# Altium PCB PCB4_impression.PcbDoc
Units mil, origin at the board's own origin, x right, y up, seen from the top; angles counter-clockwise.
Board outline 6000 x 4000 mil, 2 copper layers (Top Layer, Bottom Layer); 55 components, 41 nets, 174 pads, 20 vias.
Unrouted connection lines stored in the file: 6.
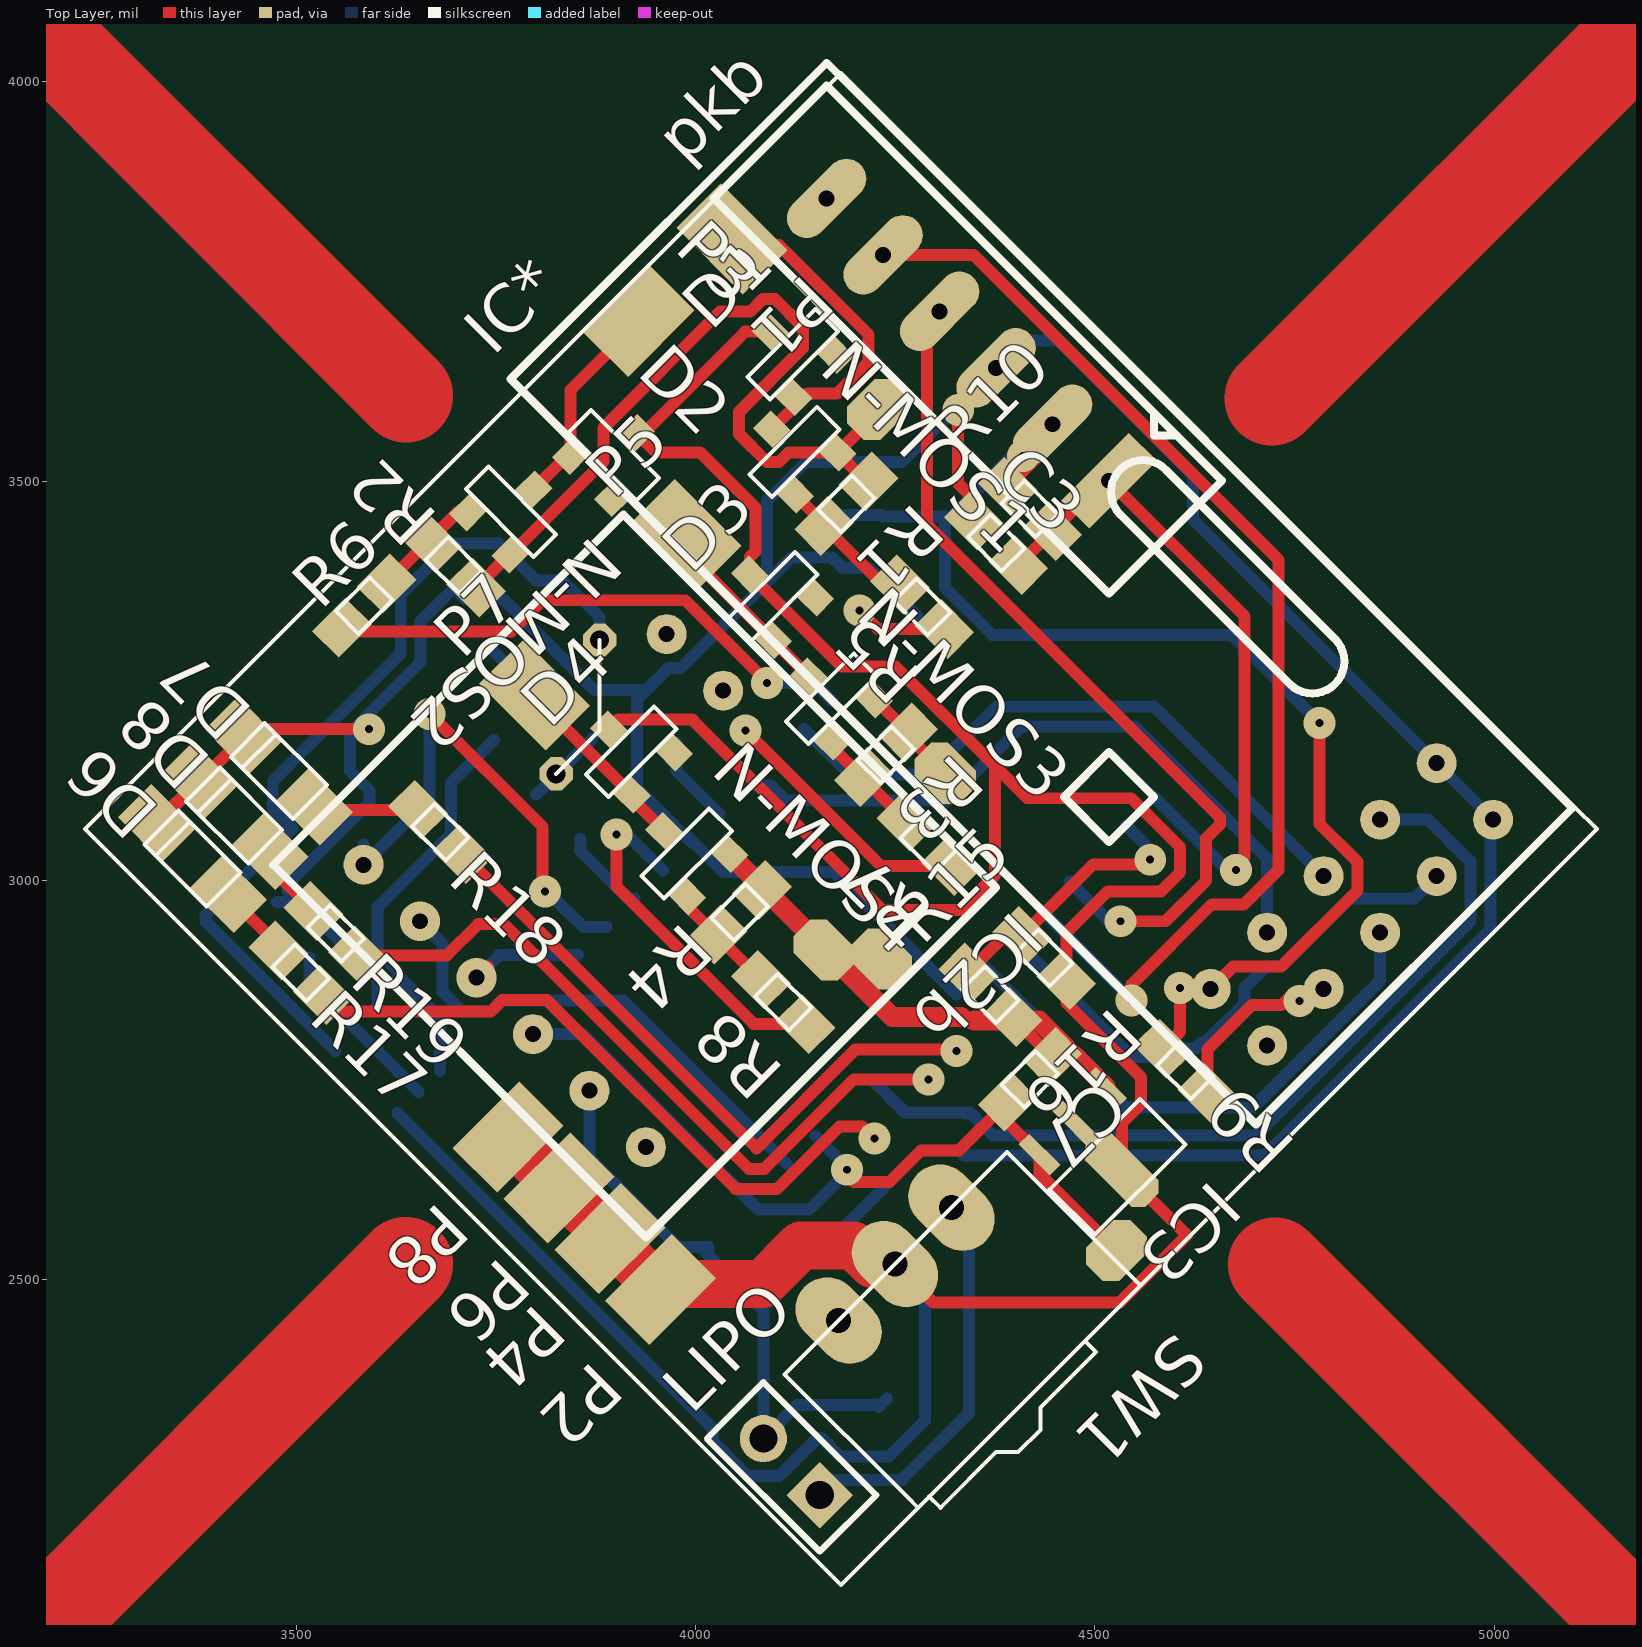
[diagram p0: Top Layer view]
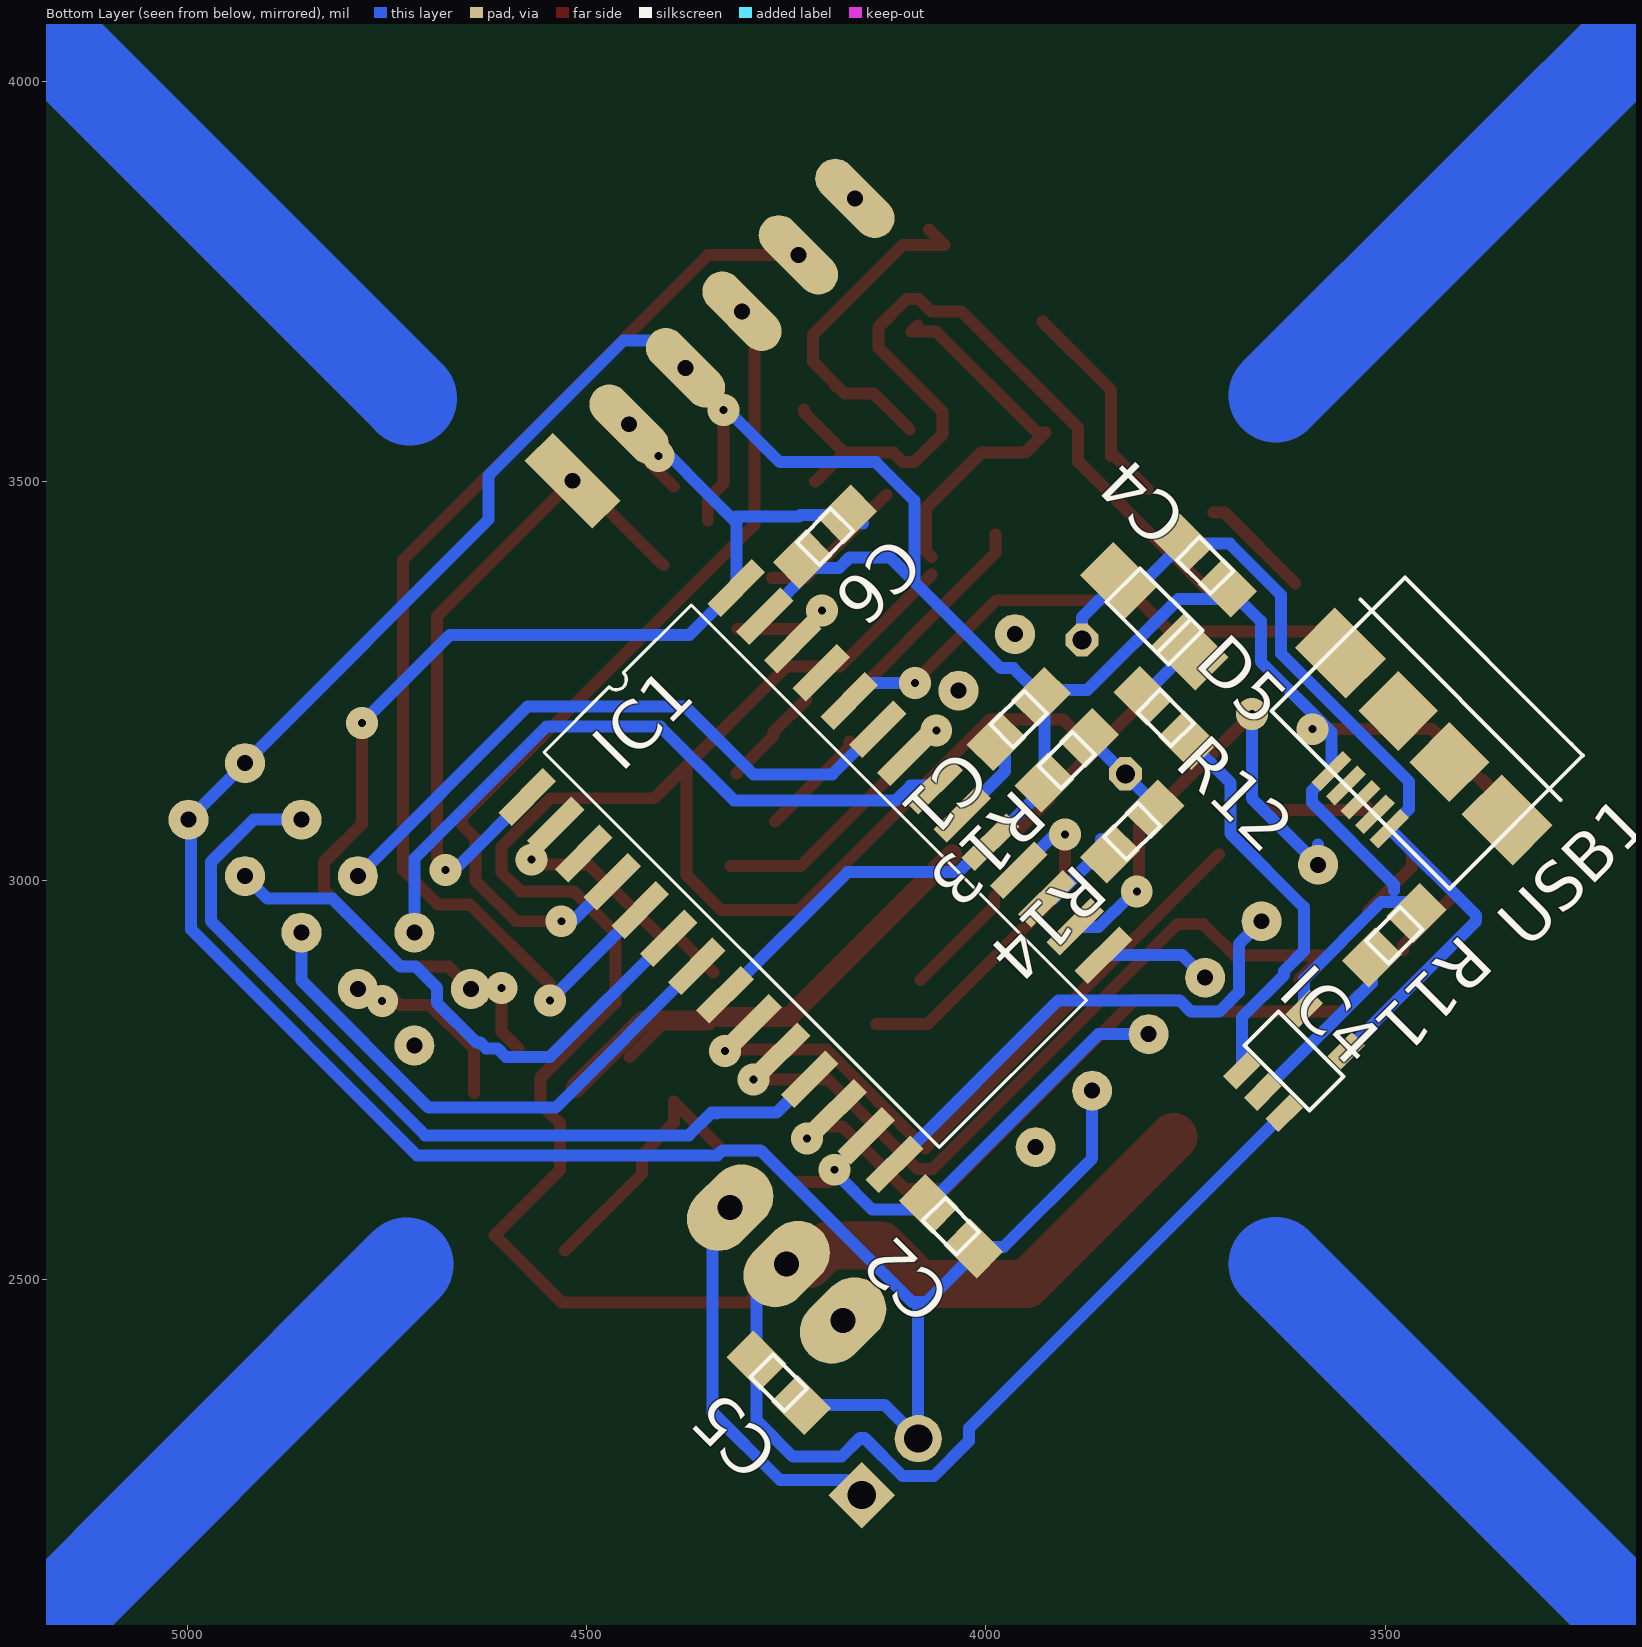
[diagram p1: Bottom Layer view, seen from below]

## Layer stack, top to bottom
Top Layer: signal copper 1.4
Dielectric: dielectric 12.6, FR-4, Dk 4.8
Bottom Layer: signal copper 1.4

## Board outline
1000,1000 7000,1000 7000,5000 1000,5000

## Design rules (kind name [scope] priority, off if disabled: settings)
Clearance [All] p1: gap=10
ComponentClearance [All] p1 off: gap=10 collisioncheckmode=3 verticalgap=10 showdistances=FALSE
PolygonConnect [All] p1: connectstyle=Relief reliefconductorwidth=10 reliefentries=4 polygonreliefangle="90 Angle"
RoutingVias [All] p1: holewidth=10 width=40 viastyle="Through Hole" minholewidth=10 minwidth=40 maxholewidth=10 maxwidth=40
SilkscreenOverComponentPads [All] p1: minsilkscreentomaskgap=10
SolderMaskExpansion [All] p1: expansion=4
Width [All] p1: maxlimit=15 minlimit=15 preferedwidth=15
26 further rules are at their usual default settings.

## Components (designator, comment, footprint, x,y, rotation, side; value= is the part's Value field where it differs from the comment)
C1 "TANTALE 10uf" cms805 3959,3201.93 r315 bottom
C2 "0.1uf ceramique" cms805 4043.85,2566.95 r45 bottom
C3 "1uf" cms805 4376.19,3422.55 r315 top
C4 "4.7uF" cms805 3725.65,3394.27 r45 bottom
C5 "4.7uF" cms805 4259.52,2371.08 r45 bottom
C6 "0.1uf ceramique" cms805 4201.54,3430.33 r315 bottom
C7 "1uF" cms805 4418.62,2750.8 r225 top
D1 "BAT54" SOT23 4093.35,3687.01 r45 top
D2 "BAT54" SOT23 3925.76,3560.44 r315 top
D3 "BAT54" SOT23 4067.89,3382.95 r45 top
D4 "BAT54" SOT23 3891.12,3189.21 r45 top
D5 "LED" cms1206 3789.29,3330.63 r225 bottom
D6 "LED" cms1206 3369.98,3027.28 r135 top
D7 "LED" cms1206 3478.17,3136.88 r135 top
D8 "LED" cms1206 3422.3,3081.02 r135 top
IC1 "dsPIC33FJ128MC802" SOIC28(300mil) 4574.18,3104.35 r135 bottom
IC2b "MPU6050" MPU6050_drotek 3937.79,2665.95 r225 top
IC3 "MCP1700" SOT89 4514.08,2740.19 r225 top
IC4 "MCP73831" SOT23-5 3623.12,2761.41 r225 bottom
IC* "NRF24L01" NRF24L01 4715.6,2793.23 r135 top
LIPO "Header 2" HDR1X2 4155.57,2230.37 r135 top
N-MOS1 "FD339" SOT23 4095.47,3564.68 r45 top
N-MOS2 "FD339" SOT23 3797.07,3489.73 r315 top
N-MOS3 "FD339" SOT23 4141.43,3255.67 r45 top
N-MOS4 "FD339" SOT23 3960.41,3061.93 r45 top
P1 "pad_moteur" PAD 4045.27,3802.97 r225 top
P2 "pad_moteur" PAD 3956.17,2487.76 r135 top
P3 "pad_moteur" PAD 3929.3,3699.74 r315 top
P4 "pad_moteur" PAD 3892.53,2551.39 r135 top
P5 "pad_moteur" PAD 3987.99,3433.16 r45 top
P6 "pad_moteur" PAD 3828.89,2615.03 r135 top
P7 "pad_moteur" PAD 3798.49,3232.34 r45 top
P8 "pad_moteur" PAD 3765.25,2678.67 r135 top
pkb "pickit3" pickit3 4517.61,3500.33 r135 top
R1 "10k" cms805 4188.81,3471.34 r225 top
R2 "10k" cms805 3697.37,3394.27 r135 top
R3 "10k" cms805 4238.31,3157.39 r225 top
R4 "10k" cms805 4055.17,2960.1 r225 top
R5 "330" cms805 4283.56,3342.65 r135 top
R6 "330" cms805 3584.94,3344.06 r45 top
R7 "330" cms805 4292.05,3045.66 r135 top
R8 "330" cms805 4109.61,2847.67 r135 top
R9 "10k" cms805 4613.07,2761.41 r135 top
R10 "10k" cms805 4418.62,3464.98 r135 top
R11 "4.7k" cms805 3488.77,2931.11 r315 bottom
R12 "150" cms805 3775.15,3203.35 r45 bottom
R13 "10k" cms805 3898.89,3150.31 r135 bottom
R14 "330" cms805 3816.87,3061.22 r315 bottom
R15 "17.25k" cms805 4369.12,2856.87 r135 top
R16 "4.7k" cms805 4436.3,2902.83 r315 top
R17 "65 + test" cms805 3505.74,2884.44 r315 top
R18 "65 + test" cms805 3680.4,3060.51 r315 top
R19 "65 + test" cms805 3549.58,2933.94 r315 top
SW1 "" inverseur 4320.33,2590.29 r225 top
USB1 "USB" USB_con 3531.2,3100.82 r45 bottom

## Footprints (in the part's own frame and the unit in brackets; to place one, negate y for a bottom-side part, rotate by r counter-clockwise, add the part's x,y. Pads: shape width x height; smd on the part's side, far side on the other; paste and mask are expansions set on the pad)
cms805 [mm]
  rect 1.5x1.2 smd: 1(-1,0) 2(1,0)
  silkscreen extent -0.76,-0.51 0.76,0.51
cms1206 [mm]
  rect 2x1.5 smd: 1(-1.6,0) 2(1.6,0)
  silkscreen extent -1.4,-0.76 1.4,0.76
HDR1X2 [mm] "Connector; Header; 2 Position"
  rect 1.5x1.5 hole 0.9: 1(0,0)
  round 1.5 hole 0.9: 2(2.54,0)
  silkscreen extent -1.27,-1.27 3.81,1.27
inverseur [mil]
  oval 80x120 hole 31.5: 1(0,0) 2(100,0) 3(200,0)
  silkscreen extent -98,0 295,276
MPU6050_drotek [mil]
  round 50 hole 20: 1(0,0) 2(0,-100) 3(0,-200) 4(0,-300) 5(0,-400) 6(0,-500) 7(-472.44,-335.83) 8(-472.44,-435.83)
  silkscreen extent -540,-580 80,80
NRF24L01 [mil]
  round 50 hole 20: 1(0,0) 2(0,-100) 3(0,-200) 4(0,-300) 5(0,-400) 6(100,-400) 7(100,-300) 8(100,-200) 9(100,-100) 10(100,0)
  silkscreen extent -60,-480 1260,80
PAD [mm]
  rect 2x3 smd: 1(0,0)
pickit3 [mil]
  rect 50x120 hole 20: 1(0,0)
  oval 50x120 hole 20: 2(100,0) 3(200,0) 4(300,0) 5(400,0) 6(500,0)
  silkscreen extent -100,-100 600,100
SOIC28(300mil) [mm]
  rect 2x0.6 smd: 1(0,0) 2(0,-1.27) 3(0,-2.54) 4(0,-3.81) 5(0,-5.08) 6(0,-6.35) 7(0,-7.62) 8(0,-8.89) 9(0,-10.16) 10(0,-11.43) 11(0,-12.7) 12(0,-13.97) 13(0,-15.24) 14(0,-16.51) 15(9.4,-16.51) 16(9.4,-15.24) 17(9.4,-13.97) 18(9.4,-12.7) 19(9.4,-11.43) 20(9.4,-10.16) 21(9.4,-8.89) 22(9.4,-7.62) 23(9.4,-6.35) 24(9.4,-5.08) 25(9.4,-3.81) 26(9.4,-2.54) 27(9.4,-1.27) 28(9.4,0)
  silkscreen extent 1.38,-17.14 8,0.64
SOT23 [mm]
  rect 0.8x0.9 smd: 1(-0.95,-2) 2(0,0) 3(0.95,-2)
  silkscreen extent -1.52,-1.52 1.52,-0.51
SOT23-5 [mm]
  rect 0.6x1.1 smd: 1(-1.016,-1.016) 2(-0.066,-1.016) 3(0.884,-1.016) 4(0.884,1.784) 5(-1.016,1.784)
  silkscreen extent -1.52,-0.38 1.4,1.14
SOT89 [mm]
  rect 0.48x1.4 smd: 1(0,0) 3(3,0)
  rect 0.48x2 smd: 2(1.5,0.3)
  oct 1.2x2.7 smd: 2(1.5,2.2)
  silkscreen extent -0.51,1.02 3.56,3.05
USB_con [mm]
  rect 2.3x1.8 smd: 0(-3.75,-2.85) 0(3.75,-2.85)
  rect 1.8x1.8 smd: 0(-1.15,-2.85) 0(1.15,-2.85)
  rect 0.4x1.4 smd: 1(-1.3,0) 2(-0.65,0) 3(0,0) 4(0.65,0) 5(1.3,0)
  silkscreen extent -4.5,-6 4.5,0

## Part data
C1 C2 C3 C4 C5 C6 C7: library part Capa
D1 D2 D3 D4: library part "Schottky BAT54"
IC2b: library part MPU6050-drotek
IC4: library part "MCP73831 Li-Po"
LIPO: "Header, 2-Pin"
N-MOS1 N-MOS2 N-MOS3 N-MOS4: library part "N-MOS FD339"
R1 R2 R3 R4 R5 R6 R7 R8 R9 R10 R11 R12 R13 R14 R15 R16 R17 R18 R19: library part Resistance
SW1: library part switch

## Free pads (board coordinates)
  oct 39.37x39.37 hole 23.62 rot 45: 0(3825.36,3133.34) 2(3879.8,3300.93)
  oct 78.74x59.06 smd rot 135: 1(4160.52,2912.73) 1(4232.65,2901.41) 2(4312.55,3134.05)
  oct 78.74x59.06 smd rot 45: 2(4227.7,3589.43) 3(4526.81,2536.55)

## Via types
v1: diameter 40, hole 10, Top Layer to Bottom Layer, 20 vias

## Nets (pads, with @x,y where several pads share a name; then routed paths per layer and width w, separated by ;. In a path a pad name is that pad's centre, name@x,y a point inside that pad or via, vN(x,y) a via of type N, cw(c..) or ccw(c..) an arc to the next point about the centre after c; other vN are vias at no path point)
GND: C1.1 C2.1 C3.1 C4.1 C5.1 C6.2 C7.1 D6.2 D7.2 D8.2 IC1.8 IC1.19 IC1.27 IC2b.2 IC3.1 IC4.5 IC*.5 IC*.6 LIPO.2 N-MOS1.3 N-MOS2.3 N-MOS3.3 N-MOS4.3 pad.1 pad.2@4227.7,3589.43 pad.2@4312.55,3134.05 pkb.3 R1.1 R2.1 R3.1 R4.1 R11.1 R13.1 R15.1 USB1.5 | length 8296
  Top Layer w15: D8.2 3325.44,3073.23 D6.2 3325.44,3070.41 3433.62,3178.59 D7.2 3441.41,3189.21 v1(3591.3,3189.21) ; R2.1 N-MOS2.3@3766.38,3407.6 ; N-MOS2.3 3884.8,3524.56 3884.8,3551.59 3884.6,3551.8 3884.6,3566.29 4030.32,3712.01 4068.22,3712.01 4084.39,3728.17 4099.21,3728.17 4134.51,3692.87 4134.51,3666.62 4054.31,3586.42 4054.31,3558.82 4089.61,3523.52 4104.11,3523.52 4116.04,3535.45 N-MOS1.3 ; N-MOS4.3 4042.54,3028.41 R4.1 4242.81,2828.14 R15.1@4396.96,2828.14 ; R1.1@4213.86,3499.18 N-MOS1.3 ; N-MOS3.3@4224.93,3226.44 R3.1 4266.14,3180.46 pad.2@4312.55,3134.05 ; pad.2@4227.7,3589.43 4227.7,3585.55 N-MOS1.3 ; C3.1 4348.35,3477.09 4328.45,3496.99 4328.45,3594.01 pkb.3 ; R15.1 R15.1@4396.96,2828.14 ; C7.1 4400.47,2824.62 R15.1@4396.96,2828.14
  Top Layer w25: N-MOS4.3 4246.58,2828.65 4332.1,2828.65 ; 4348.33,2824.62 4400.47,2824.62 4429.65,2824.62 IC3.1
  Bottom Layer w15: R11.1@3475.08,2973.09 3504.95,2973.09 3601.74,2876.3 IC4.5 IC4.5@3599.98,2841.12 ; 3489.22,2987.23 3489.22,2992.66 ; 3490.44,2993.89 3489.22,2992.66 ; IC2b.2 3867.07,2651.8 3977.83,2541.05 C2.1@4005.67,2541.05 ; IC1.19 IC1.19@3987.99,3054.15 ; C2.1 4016.01,2541.05 C2.1@4005.67,2541.05 ; C5.1@4229.11,2340.68 C5.1 ; C5.1@4239.46,2351.02 C5.1 ; IC1.27 4216.65,3391.18 4183.87,3391.18 4170.88,3404.17 4119.76,3404.17 4089.58,3373.99 ; IC1.8 4173.25,3010.31 4034.66,3010.31 3990.82,3054.15 IC1.19@3987.99,3054.15 ; 3489.22,2992.66 3489.22,2995.11 3591.85,3097.74 3591.85,3112.24 3567.39,3136.7 USB1.5 3567.39,3185.47 3655.82,3273.91 3655.82,3324.44 C4.1 3711.94,3352.3 3758.96,3352.3 3873,3238.26 C1.1@3938.23,3238.26 ; C1.1@3938.23,3238.26 3965.66,3265.69 3981.28,3265.69 4089.58,3373.99 ; C1.1@3938.23,3238.26 3926.73,3226.76 R13.1 3926.73,3115.4 IC1.19@3987.99,3054.15 ; C2.1@4005.67,2541.05 4074.74,2471.98 ; 4074.74,2471.98 4084.86,2461.85 LIPO.2 4127.03,2343.24 C5.1 ; 4074.74,2471.98 4092.42,2471.98 4282.37,2661.93 4330.01,2661.93 4336.14,2655.8 4712.52,2655.8 4995.23,2938.51 4995.23,3072.86 IC*.5 IC*.6 4622.97,3451.54 4622.97,3506.7 4453.97,3675.69 4410.13,3675.69 pkb.3 4258.1,3523.67 4137.9,3523.67 4089.58,3475.35 4089.58,3373.99
  other v1: 4328.82,3588.72
NET1: IC1.6 IC*.4 | length 711.7
  Bottom Layer w15: IC1.6 4545.9,2779.08 4601.05,2779.08 4611.64,2789.67 4625.78,2789.67 4632.82,2796.71 4637.77,2796.71 4687.39,2846.33 4687.39,2865.42 4714.12,2892.15 4733.21,2892.15 4818.21,2977.15 4899.52,2977.15 IC*.4 IC*.4@4917.13,3015.96
NET2: IC1.7 IC*.3 | length 694.2
  Bottom Layer w15: IC1.7 4538.83,2715.44 4697.93,2715.44 4857.02,2874.54 IC*.3
NET3: IC1.21 IC*.9 | length 857.5
  Bottom Layer w15: IC1.21 4094.27,3118.55 4112.6,3100.22 4315.49,3100.22 4407.76,3192.49 4550.39,3192.49 4715.6,3027.28 IC*.9
NET4: IC1.23 IC*.8 | length 797.1
  Bottom Layer w15: IC1.23 4192.34,3132.64 4291.34,3132.64 4376.19,3217.49 4574.18,3217.49 IC*.8
NetC1_2: C1.2 IC1.20 | length 110.9
  Bottom Layer w15: C1.2@3976.23,3171.97 3976.23,3136.62 IC1.20
NetC3_2: C3.2 IC1.1 pkb.1 R10.1 | length 847.9
  Top Layer w15: C3.2 R10.1 4509.65,3500.33 pkb.1 4687.32,3330.63 4687.32,3029.4 v1@4680.95,3023.04
  Bottom Layer w15: IC1.1 4659.03,3019.5 4670.35,3019.5 v1(4676.71,3013.14)
NetD1_1: D1.1 N-MOS1.2 P1.1 | length 430.4
  Top Layer w15: P1.1@4071.43,3814.99 4051.63,3795.2 4104.46,3795.2 4216.64,3683.02 4216.64,3649.14 4188.1,3620.6 4188.1,3619.13 4186.63,3619.13 4176.87,3609.37 4140.16,3609.37 N-MOS1.2
NetD2_1: D2.1 N-MOS2.2 P3.1 | length 262.7
  Top Layer w15: N-MOS2.2 D2.1@3838.55,3531.21 ; D2.1 3843.64,3614.08 P3.1
NetD3_1: D3.1 N-MOS3.2 P5.1 | length 240.2
  Top Layer w15: P5.1 3987.99,3409.96 D3.1 ; D3.1@4097.12,3299.98 N-MOS3.2
NetD4_1: D4.1 N-MOS4.2 P7.1 | length 232.4
  Top Layer w15: P7.1 3798.49,3228.94 D4.1 ; D4.1@3920.35,3101.99 N-MOS4.2
NetD5_2: D5.2 R12.2 | length 77.6
  Bottom Layer w15: D5.2@3748.09,3286.08 R12.2
NetD6_1: D6.1 R17.1 | length 95.3
  Top Layer w15: D6.1@3414.52,2981.32 3477.9,2917.94 R17.1
NetD7_1: D7.1 R18.1 | length 131.5
  Top Layer w15: D7.1 3526.69,3088.35 R18.1
NetD8_1: D8.1 R19.1 | length 97.4
  Top Layer w15: D8.1 3466.85,3016.68 R19.1
NetIC1_2: IC1.2 R15.2 R16.1 | length 364.8
  Top Layer w15: R15.2 4387.24,2930.67 R16.1 4497.91,3020.11 4563.48,3020.11 v1@4574.89,3031.52
  Bottom Layer w15: IC1.2 4581.25,3026.57 4581.25,3025.16 v1@4574.89,3031.52
  other v1: 4569.19,3025.82
NetIC1_4: IC1.4 pkb.4 | length 1090.7
  Top Layer w15: pkb.4 4289.92,3696.91 4289.92,3445.18 4656.25,3078.85 4656.25,3069.75 4639.21,3052.71 4639.21,2999.68 4588.32,2948.79 v1(4531.76,2948.79)
  Bottom Layer w15: IC1.4 4517.61,2948.79 v1(4531.76,2948.79)
NetIC1_5: IC1.5 pkb.5 | length 1464.4
  Top Layer w15: pkb.5 4347.91,3783.18 4729.75,3401.34 4729.75,3013.14 4686.61,2970 4646.31,2970 4545.9,2869.59 v1(4545.9,2849.79)
  Bottom Layer w15: IC1.5 v1(4545.9,2849.79)
NetIC1_9: IC1.9 R18.2 | length 830.2
  Top Layer w15: R18.2 4076.38,2664.53 4200.15,2788.3 4324.55,2788.3 v1(4326.69,2786.15) v1@4326.69,2793.23
NetIC1_10: IC1.10 R19.2 | length 946.1
  Top Layer w15: 3607.57,2875.96 R19.2 3688.62,2906.1 3727.77,2945.25 3760.3,2945.25 4066.73,2638.82 4086.03,2638.82 4198,2750.8 v1(4291.34,2750.8)
NetIC1_11: IC1.11 IC*.7 | length 1100.3
  Bottom Layer w15: IC1.11 4262.12,2709.3 4336.37,2709.3 ; 4337.3,2708.37 4336.37,2709.3 ; IC*.7 4917.13,3076.07 4970.23,3022.96 4970.23,2948.86 4702.17,2680.8 4371.95,2680.8 4343.44,2709.3 4336.37,2709.3
NetIC1_12: IC1.12 R17.2 | length 842.1
  Top Layer w15: R17.2 3554.61,2835.58 3743.26,2835.58 3757.9,2850.22 3813.61,2850.22 4050.01,2613.82 4102.04,2613.82 4180.32,2692.11 4208.61,2692.11 v1(4224.16,2676.55)
NetIC1_14: IC1.14 IC2b.5 | length 632.6
  Bottom Layer w15: IC2b.5 3683.15,2920.58 3683.15,2860.47 3708.05,2835.58 3743.26,2835.58 3757.55,2849.87 3909.43,2849.87 IC1.14
NetIC1_15: IC1.15 IC2b.4 | length 159
  Top Layer w15: IC2b.4 IC2b.4@3739.8,2892.22
  Bottom Layer w15: IC2b.4 3753.99,2906.42 IC1.15
NetIC1_16: IC1.16 IC2b.6 | length 647.5
  Top Layer w15: v1(3666.96,3208.3) 3808.39,3066.88 3808.39,2992.63 3817.58,2992.63 v1(3811.21,2986.27)
  Bottom Layer w15: 3584.23,3044.96 IC2b.6 3666.96,3102.23 v1(3666.96,3208.3) ; v1(3811.21,2986.27) 3817.58,2992.63 3817.58,2982.73 3840.2,2960.11 3840.64,2960.11 3858.97,2941.77 IC1.16
NetIC1_17: IC1.17 R14.2 | length 107.6
  Bottom Layer w15: R14.2@3856.02,3051.76 3856.02,3036.21 3915.1,2977.13 IC1.17
NetIC1_18: IC1.18 R8.1 | length 450
  Top Layer w15: v1(3901.02,3057.68) 3901.02,2992.07 4072.65,2820.43 4136.86,2820.43 R8.1
  Bottom Layer w15: v1(3901.02,3057.68) 3913.74,3057.68 IC1.18
NetIC1_22: IC1.22 R7.1 | length 328.1
  Top Layer w15: v1(4062.24,3187.79) 4232.2,3017.82 R7.1
NetIC1_24: IC1.24 R6.1 | length 666.9
  Top Layer w15: R6.1 3561.98,3311.34 3769.23,3311.34 3808.57,3350.69 3987.02,3350.69 v1@4077.09,3260.62
  Bottom Layer w15: v1(4089.11,3247.19) 4148.5,3247.19 IC1.24
NetIC1_26: IC1.26 R5.1 | length 115.8
  Top Layer w15: v1(4205.07,3337.7) 4227.96,3314.81 R5.1
NetIC4_1: IC4.1 R12.1 | length 506.5
  Bottom Layer w15: IC4.1 3679.69,2828.58 3626.74,2881.53 3626.74,2886.65 3601.91,2911.49 3601.91,2966.47 3693.83,3058.39 3693.83,3122.03 R12.1
NetIC4_2: IC4.2 R11.2 | length 224.9
  Bottom Layer w15: R11.2 3516.61,2871.59 IC4.2
NetIC*_2: IC*.2 R9.1 | length 231.5
  Top Layer w15: R9.1 4640.91,2788.39 4696.51,2843.99 4733.84,2843.99 v1@4744.59,2854.74
  Bottom Layer w15: v1@4744.59,2854.74 4777.12,2854.74 IC*.2
  other v1: 4755.91,2849.09
NetLIPO_1: LIPO.1 SW1.1 | length 495.4
  Bottom Layer w15: LIPO.1 4174.67,2249.46 4258.1,2249.46 4342.44,2333.8 4342.44,2568.18 SW1.1
PWM1: N-MOS1.1 R1.2 R5.2 | length 187.9
  Top Layer w15: N-MOS1.1 4160.97,3446.29 R1.2 4226.21,3378.26 R5.2@4267.74,3378.26
PWM2: N-MOS2.1 R2.2 R6.2 | length 138.9
  Top Layer w15: R6.2 3701.37,3460.49 N-MOS2.1
PWM3: N-MOS3.1 R3.2 R7.2 | length 138.8
  Top Layer w15: N-MOS3.1 4170.66,3167.05 R7.2
PWM4: N-MOS4.1 R4.2 R8.2 | length 142.5
  Top Layer w15: N-MOS4.1 3989.64,2967.64 R8.2
USB: C4.2 D5.1 IC4.4 pad.0 pad.2@3879.8,3300.93 R13.2 R14.1 USB1.1 | length 1202.8
  Bottom Layer w15: USB1.1 USB1.1@3495.01,3064.93 ; IC4.4 3386.24,2949.07 3386.24,2956.17 USB1.1@3495.01,3064.93 ; R14.1@3800.35,3107.44 R13.2 ; pad.2@3879.8,3300.93 3879.8,3329.2 D5.1 3800.43,3375.17 C4.2 3752.9,3421.51 3694.74,3421.51 3630.82,3357.59 3630.82,3284.26 3470.55,3123.99 3470.55,3089.39 USB1.1@3495.01,3064.93
VBAT: C5.2 D1.2 D2.2 D3.2 D4.2 IC3.2 IC4.3 P2.1 P4.1 P6.1 P8.1 R16.2 SW1.2 | length 4904.1
  Top Layer w15: D4.2 3903.05,3201.14 3995.86,3201.14 4234.25,2962.74 4331.31,2962.74 4374.97,3006.4 4374.97,3142.91 ; P2.1 4082.04,2487.76 4137.29,2543.01 ; D3.2 4183.24,3267.61 4250.27,3267.61 4374.97,3142.91 ; D3.2@4067.89,3404.8 4075.09,3411.99 4075.09,3466.27 4005.67,3535.69 3950.51,3535.69 D2.2 3935.48,3560.44 4062.05,3687.01 D1.2 D1.2@4085.96,3694.39 ; SW1.2 4297.7,2471.49 4531.05,2471.49 4615.15,2555.6 4533.56,2637.19 4533.56,2695.96 4557.75,2720.14 4557.75,2753.09 4464.13,2846.7 R16.2 4464.13,2934.2 4516.22,2986.29 4582.69,2986.29 4606.69,3010.28 4606.69,3041.35 4545.24,3102.8 4415.08,3102.8 4374.97,3142.91
  Top Layer w60: P8.1 P6.1 P4.1 3949.1,2494.83 4083.45,2494.83 4131.63,2543.01 4137.29,2543.01 4197.9,2543.01 4221.34,2519.58 SW1.2
  Bottom Layer w15: IC4.3 4021.2,2314.11 4021.2,2298.23 4065.38,2254.05 4104.34,2254.05 4152.08,2301.79 4157.7,2301.79 4181.03,2278.45 4241.84,2278.45 4287.36,2323.97 C5.2 4287.36,2481.84 SW1.2
VCC: C2.2 C6.1 C7.2 IC1.13 IC1.28 IC2b.3 IC3.3 IC*.1 IC*.10 pad.3 pkb.2 R9.2 R10.2 | length 2749
  Top Layer w15: v1@4198,2622.11 4242.55,2622.11 4282.37,2661.93 4329.75,2661.93 C7.2 4390.78,2696.46 IC3.3 4430.56,2632.79 pad.3 ; R10.2 4446.9,3548.94 pkb.2 ; R9.2 4606.71,2810.72 v1(4606.71,2865.35) ; IC*.10 4673.1,2892.15 4733.21,2892.15 4828.81,2987.75 4828.81,3022.96 4781.36,3070.41 v1(4781.36,3196.98)
  Bottom Layer w15: IC2b.3 3859.11,2807.37 C2.2 4078.32,2588.16 4142.85,2588.16 4185.27,2630.59 4185.27,2644.73 IC1.13 ; C6.1@4153.9,3446.85 4164.62,3457.57 4232.45,3457.57 4234.24,3455.78 4312.5,3455.78 IC1.28 ; pkb.2 4435.59,3571.04 4312.5,3447.95 IC1.28 ; v1(4781.36,3196.98) 4671.06,3307.29 4371.24,3307.29 IC1.28
  other v1: 4189.52,2637.66 4410.13,3531.45
pads on no net: D1.3 D2.3 D3.3 D4.3 IC1.3 IC1.25 IC2b.1 IC2b.7 IC2b.8 pkb.6 SW1.3 USB1.0 USB1.2 USB1.3 USB1.4

## Other copper
Multi-Layer:
  circle w20: c5365.18,1879.19 r137.79
  circle w20: c5365.18,1879.19 r200
  circle w20: c3000.85,1883.16 r137.79
  circle w20: c3000.85,1883.16 r200
  circle w20: c2997.59,4246.78 r137.79
  circle w20: c2997.59,4246.78 r200
  circle w20: c5361.19,4243.5 r200
  circle w20: c5361.19,4243.5 r137.79
  lines w118.11: 3136.24,4108.13 3637.34,3607.03 ; 3139.46,2021.77 3637.27,2519.58 ; 4721.44,3603.75 5222.54,4104.85 ; 4725.44,2518.94 5226.53,2017.84

## Silkscreen, mask and mechanical layers (free items; w line width, h text height)
Top Overlay:
  lines w5: 3825.36,3133.34 3879.8,3187.79 3879.8,3300.93 ; 3235.24,3064.04 3263.08,3091.88 4181.77,4010.56 5100.45,3091.88 5128.29,3064.04 4181.77,2117.52 3235.24,3064.04